# Altium PCB PanelFK_PLC.PcbDoc
Units mil, origin at the board's own origin, x right, y up, seen from the top; angles counter-clockwise.
Board outline 6000 x 4000 mil, 2 copper layers (Top Layer, Bottom Layer); 25 components, 21 nets, 95 pads, 0 vias.
Unrouted connection lines stored in the file: 5.
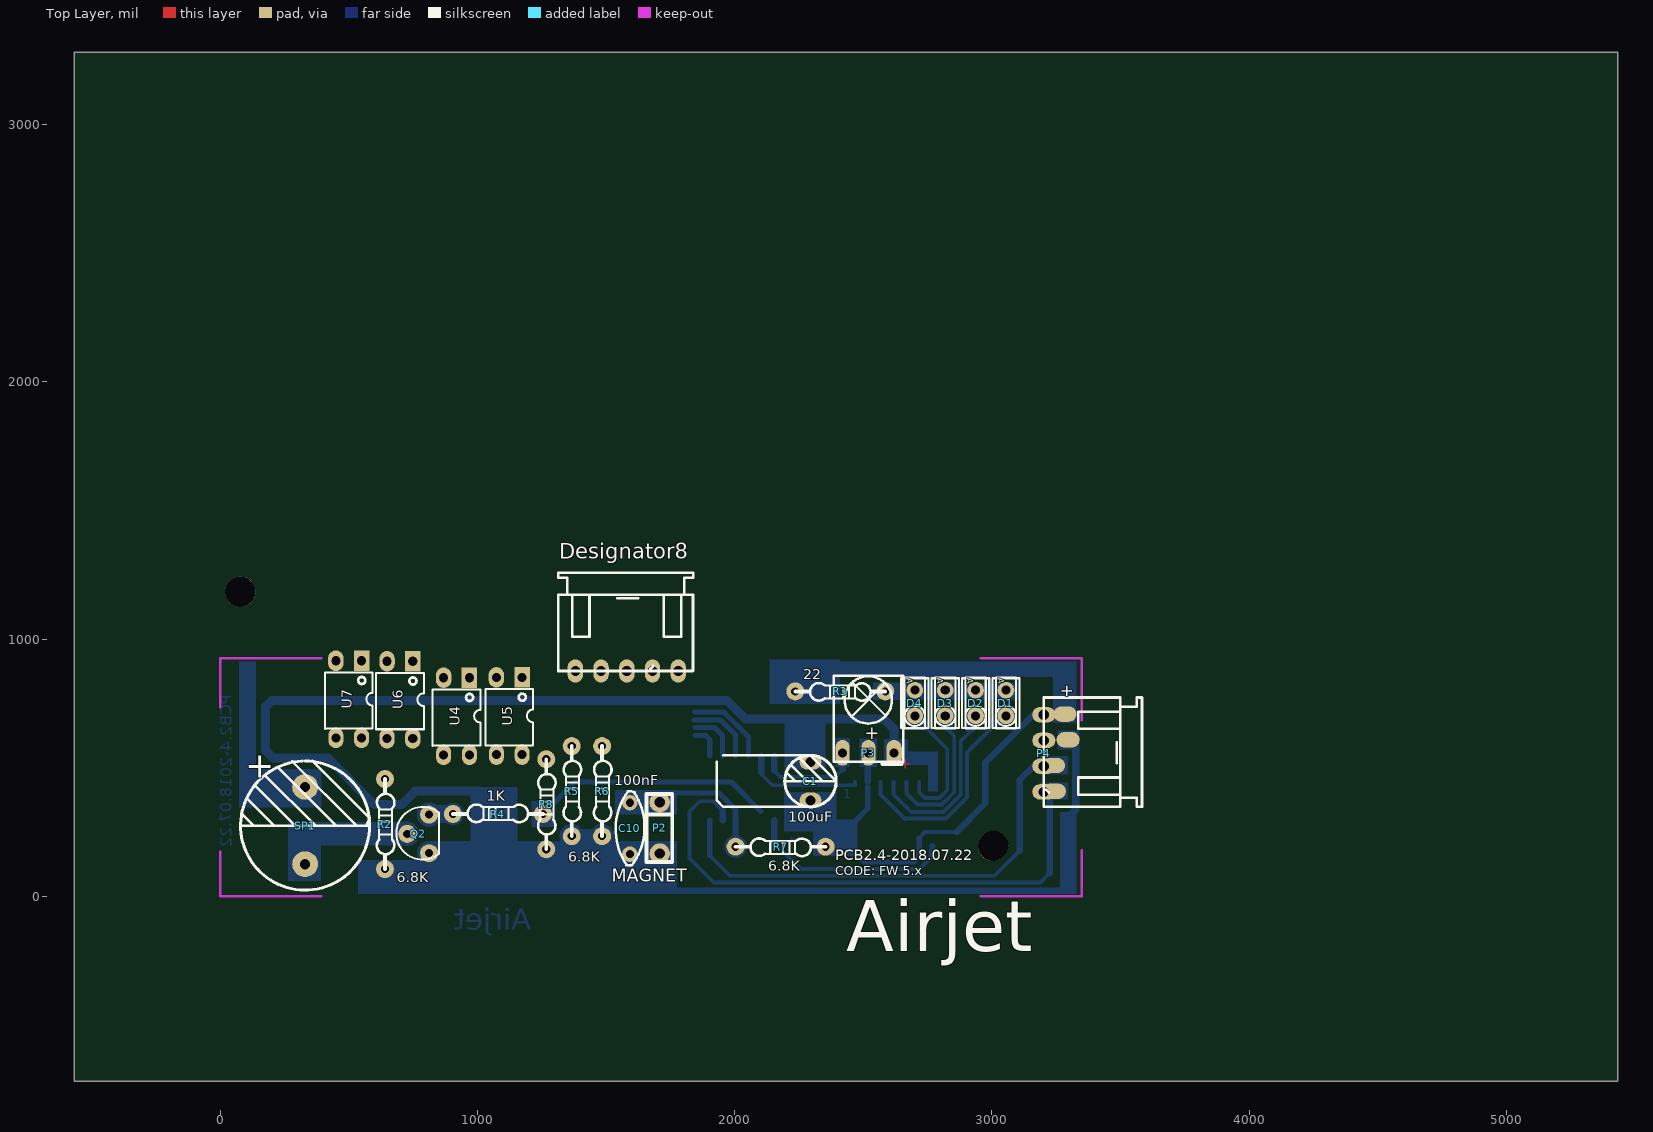
[diagram p0: Top Layer view]
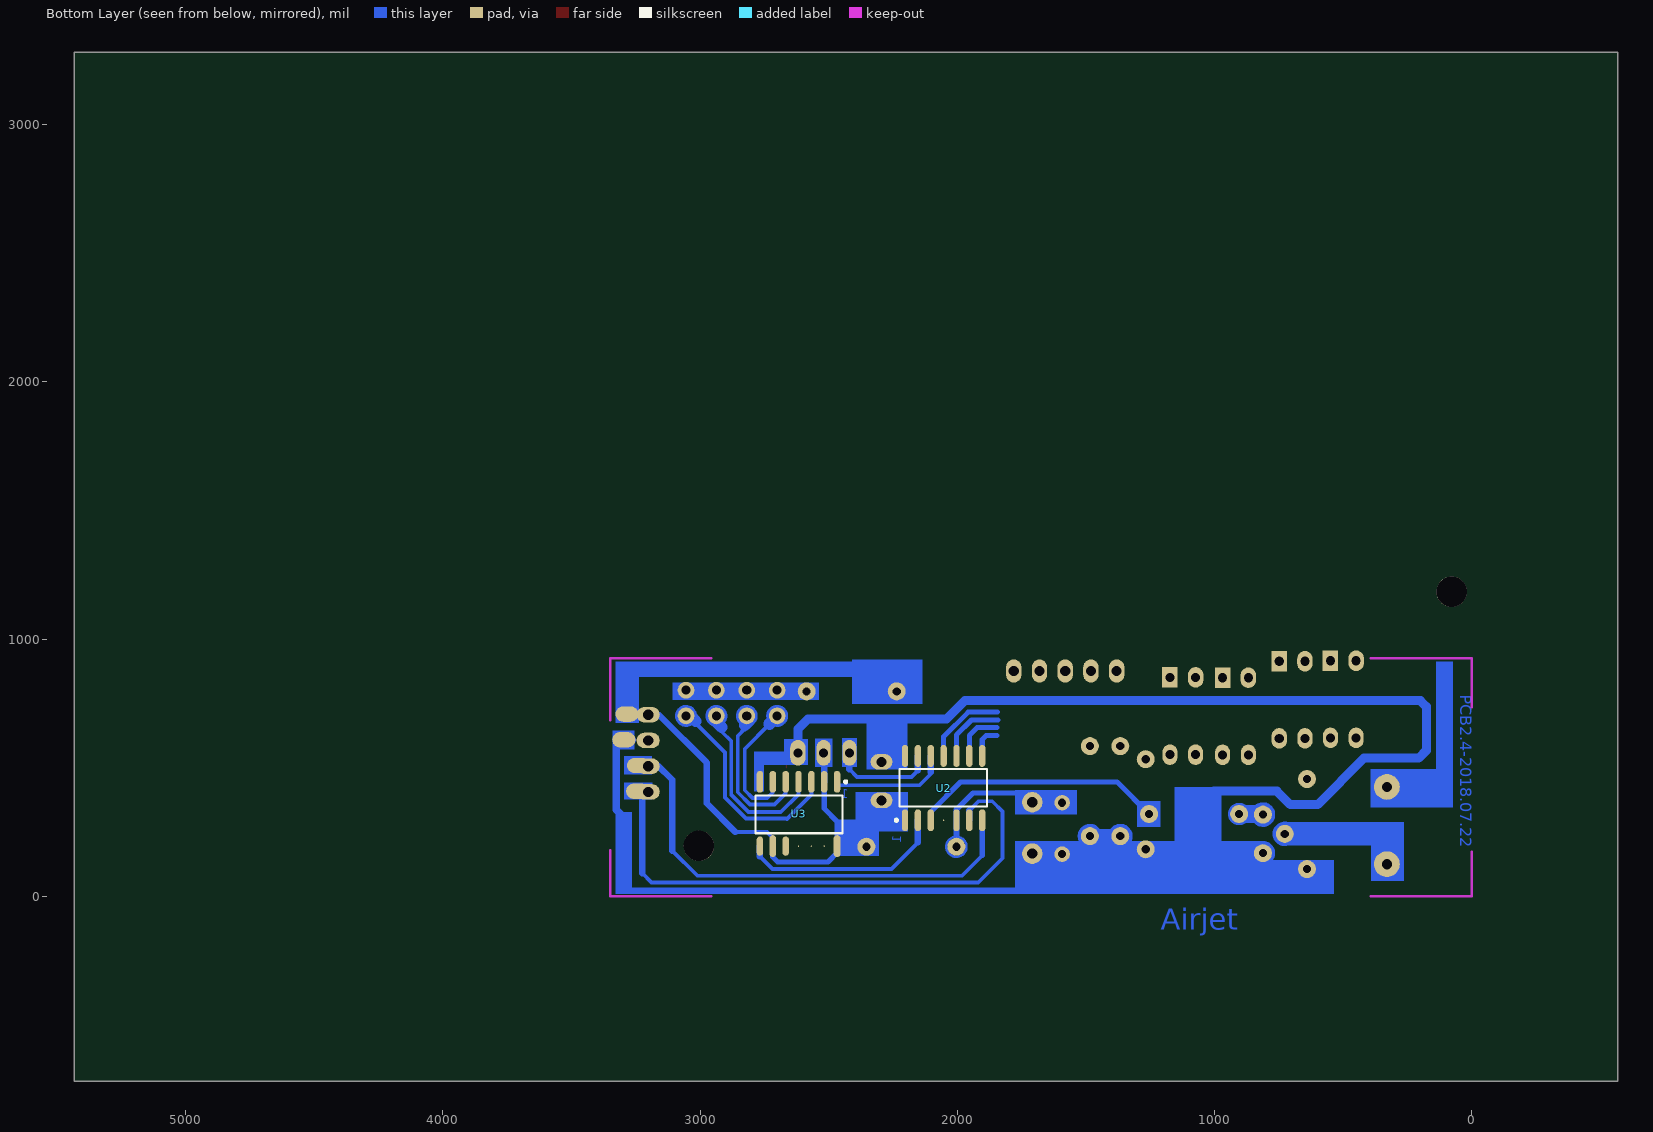
[diagram p1: Bottom Layer view, seen from below]

## Layer stack, top to bottom
Top Solder: solder mask 0.4, Solder Resist, Dk 3.5
Top Layer: signal copper 1.4
Dielectric1: dielectric 12.6, FR-4, Dk 4.8
Bottom Layer: signal copper 1.4
Bottom Solder: solder mask 0.4, Solder Resist, Dk 3.5

## Board outline
-566.82,-718.74 5433.18,-718.74 5433.18,3281.26 -566.82,3281.26

## Design rules (kind name [scope] priority, off if disabled: settings)
Clearance [All] p1: gap=10
FabricationTestPointUsage TestPointUsage [All] p1: valid=0 allowmultiple=FALSE
FabricationTestpoint Testpoint [All] p1: side=3 testpointundercomponent=TRUE minsize=40 maxsize=100 preferedsize=60 minholesize=0 maxholesize=40 preferedholesize=32 testpointgrid=1 allowsidetop=TRUE allowsidebottom=TRUE usegrid=TRUE gridtolerance=0.01
PolygonConnect [All] p1: connectstyle=Relief reliefconductorwidth=10 reliefentries=4 polygonreliefangle="90 Angle" airgapwidth=10
RoutingVias [All] p1: holewidth=28 width=50 viastyle="Through Hole" minholewidth=28 minwidth=50 maxholewidth=28 maxwidth=50
SolderMaskExpansion [All] p1: expansion=4
Width [All] p1: maxlimit=100 minlimit=10 preferedwidth=25 minimp=50.000000 maximp=50.000000 favimp=50.000000
27 further rules are at their usual default settings.

## Classes and differential pairs
component class DDFK: C1 C10 D1 D2 D3 D4 P2 P3 P4 P5 Q2 R2 R4 R5 R6 R7 SP1 U2 U3

## Components (designator, comment, footprint, x,y, rotation, side; value= is the part's Value field where it differs from the comment)
C1 "100uF" RB.15/.2 2295,398 r90 top
C10 "100nF" RAD0.2 1593,164 r90 top
D1 "L1" LED0.5Rec 3055.12,751.54 r270 top locked
D2 "L2" LED0.5Rec 2937.01,751.54 r270 top locked
D3 "L3" LED0.5Rec 2818.9,751.54 r270 top locked
D4 "L4" LED0.5Rec 2700.79,751.54 r270 top locked
Designator8 "Comment" xH5RA 1381,876 r270 top
P2 "Magnet" Magnet 1709,366 r270 top
P3 "IrReceiver" IrRec1 2519.68,763.8 r0 top locked
P4 "Header 4" xH4RA 3202,706 r180 top
Q2 "2N3904" TO92BS2 787.4,242.8 r270 top
R2 "6.8K" RES0.35 641,106 r90 top
R3 "22" RES0.35 2236,797 r0 top (schematic designator R1)
R4 "1K" RES0.35 1255,320 r180 top
R5 "6.8K" RES0.35 1367,234 r90 top
R6 "10K" RES0.35 1485,234 r90 top
R7 "6.8K" RES0.35 2004,193 r0 top
R8 "10K" RES0.35 1268,183 r90 top (schematic designator R6)
SP1 "BUZZER" RB.3/.6 330.39,425.2 r90 top
U2 "ATtiny24A-SSU" SOIC14#1 2203.72,295.8 r90 bottom
U3 "MC74HC164AN" SOIC14#2 2467.8,445.28 r270 bottom
U4 "PC817" DIP4-OPTO 969,850 r180 top (schematic designator U3)
U5 "PC817" DIP4-OPTO 1174,851 r180 top (schematic designator U3)
U6 "PC817" DIP4-OPTO 749,914 r180 top (schematic designator U3)
U7 "PC817" DIP4-OPTO 550,916 r180 top (schematic designator U3)

## Footprints (in the part's own frame and the unit in brackets; to place one, negate y for a bottom-side part, rotate by r counter-clockwise, add the part's x,y. Pads: shape width x height; smd on the part's side, far side on the other; paste and mask are expansions set on the pad)
DIP4-OPTO [mil] "DIP; 4 Leads; Row Spacing 7.62 mm; Pitch 2.54 mm"
  rect 60x80 hole 35.43: 1(0,0)
  oval 60x80 hole 35.43: 2(100,0)
  oval 59.05x80 hole 35.43: 3(100,300) 4(0,300)
  silkscreen extent -43,46 143,265
IrRec1 [mil] "38KHz Ir Receiver"
  oval 55x100 hole 35.43: 1(-99.65,-205.95) 2(0.35,-205.95)
  oval 60x100 hole 35.43: 3(100.35,-205.95)
  silkscreen extent -135,-249 135,94
LED0.5Rec [mil] "Led 0.5mm Rectangular"
  round 65 hole 35.43: 1(-50,0) 2(50,0)
  silkscreen extent -98,-53 98,53
Magnet [mil]
  round 80 hole 39.37: 1(0,0) 2(200,0)
  silkscreen extent -31,-51 232,49
RAD0.2 [mil]
  round 60 hole 31.5: 1(0,0) 2(200,0)
  silkscreen extent -44,-57 244,55
RB.3/.6 [mil]
  round 100 hole 40: 1(0,0) 2(-300,0)
  silkscreen extent -401,-251 102,251
RB.15/.2 [mil]
  oval 60x85 hole 39.37: 1(-25,0) 2(125,0)
  silkscreen extent -50,-100 150,100
RES0.35 [mil] "Diode, Axial; Body 5.2 x 2.7 mm (LxDia. max), Lead Dia. 0.86 mm (max)"
  round 70 hole 31.5: 1(0,0)
  round 70 hole 31.5 paste+0: 2(350,0)
  silkscreen extent 0,-37 350,32
SOIC14#1 [mil] "SOIC, 16-Leads, Body 9.9x3.9mm, Pitch 1.27mm, IPC High Density"
  oval 85x25 smd: 1(0,0) 2(0,-50) 3(0,-100) 5(0,-200) 6(0,-250) 7(0,-300) 8(250.04,-300) 9(250.04,-250) 10(250.04,-200) 11(250.04,-150) 12(250.04,-100) 13(250.04,-50) 14(250.04,0)
  round 5 smd: 4(0,-150)
  silkscreen extent -5,-318 200,38, body extent 16,-318 235,20, height 69
SOIC14#2 [mil] "SOIC, 16-Leads, Body 9.9x3.9mm, Pitch 1.27mm, IPC High Density"
  oval 85x25 smd: 1(0,0) 2(0,-50) 3(0,-100) 4(0,-150) 5(0,-200) 6(0,-250) 7(0,-300) 9(250.04,-250)
  oval 75x25 smd: 8(250.04,-300) 10(250.04,-200)
  round 5 smd: 11(250.04,-150) 12(250.04,-100) 13(250.04,-50)
  oval 85x27 smd: 14(250.04,0)
  silkscreen extent -5,-318 200,38, body extent 16,-318 235,20, height 69
TO92BS2 [mil] "NPN-CC5551,C945 Base Side"
  round 70 hole 31.5: 1(-75,25) 2(0,-60) 3(75,25)
  silkscreen extent -105,-102 100,63
xH4RA [mil] "100mil between pins"
  oval 90x60 hole 39.37: 1(0,0) 2(0,100) 3(0,200) 4(0,300)
  silkscreen extent -382,-67 0,358
xH5RA [mil] "100mil between pins"
  oval 90x60 hole 39.37: 1(0,0) 2(0,100) 3(0,200) 4(0,300) 5(0,400)
  silkscreen extent -382,-67 0,458

## Part data
C1 C10: library part Cap, "Capacitor SMD"
D1 D2 D3 D4: library part LED0.5, "LED Radial 0.5"
P2: library part "Header 6", "Header, 6-Pin"
P3: library part "Header 3", "3pin"
P4: library part "Header 5", "Header, 5-Pin"
Q2: library part BC337, "NPN General Purpose Amplifier"
R2 R3 R4 R5 R6 R7 R8: library part Resistor, "Resistor"
U2: library part ATtiny24-16PC, "8-Bit AVR Microcontroller with 2K Bytes of Flash Memory"
U3: "8-Bit Serial Input / Parallel-Output Shift Register"
U4 U5 U6 U7: library part Optoisolator1, "4-Pin Phototransistor Optocoupler"

## Free pads (board coordinates)
  round 118.11 hole 118.11: 0(3005,196) 1(79,1184)
  oval 90x60 all layers, no hole: 2(3240,508.66) 2(3243,408.66) 2(3285,708.66) 2(3297,608.66)

## Nets (pads, with @x,y where several pads share a name; then routed paths per layer and width w, separated by ;. In a path a pad name is that pad's centre, name@x,y a point inside that pad or via, vN(x,y) a via of type N, cw(c..) or ccw(c..) an arc to the next point about the centre after c; other vN are vias at no path point)
+5V: C1.1 P3.2 P4.1 pad.2@3285,708.66 R3.1 R7.2 SP1.1 U2.1 U3.2 U3.9 U3.14 | length 1737.7
  Bottom Layer w15: U3.9@2717.8,227.28 2740.8,250.28 2863.28,250.28
  Bottom Layer w20: R7.2 R7.2@2378,169 ; U3.2@2517.8,425.28 2517.8,341.28 2467.8,291.28 U3.14 2467.8,169.2 2503,134 2698.52,134 2717.8,153.28 U3.9 ; U3.2@2520.04,448.96 P3.2 ; U3.9@2717.8,211.28 U3.9 ; U3.9@2717.8,227.28 U3.9
  Bottom Layer w25: U3.2 P3.2@2517.8,557.85 ; 2863.28,250.28 2975,362 2975,520 3159.5,704.5 pad.2@3270.5,704.5
BUZZER: R4.1 U2.3 | length 945.6
  Bottom Layer w20: R4.1 1379,444 1988,444 U2.3@2102,330
CLK: U2.2 U3.8 | length 803.6
  Bottom Layer w15: 2153.72,209.28 2256.5,106.5 2719.5,106.5 2767.8,154.8
  Bottom Layer w25: 2153.72,209.28 U2.2 ; 2767.8,154.8 U3.8
DIMOUT: P4.3 pad.2@3240,508.66 U2.7 | length 1876.5
  Bottom Layer w15: 1903.72,158.28 1982,80 3011,80 3109,178
  Bottom Layer w20: 1903.72,158.28 U2.7
  Bottom Layer w25: 3109,178 3109,453 3164,508 3257.62,508 pad.2@3267.72,497.91
GND: C1.2 C10.1 P2.2 P3.3 P4.2 pad.2@3297,608.66 Q2.3 R2.1 R5.1 R6.1 R8.1 U2.14 U3.7 | length 4896.1
  Bottom Layer w25: 847.4,167.8 ccw(c812.4,167.8) 847.4,167.8
  Bottom Layer w30: 3288,298.94 3326,336.94 pad.2@3326,589
  Bottom Layer w35: 1078,203 1078,334.28 1003.28,409 758,409 706,357 599.89,357 419.89,537 207,537 177,567 177,738 200,761 1971,761 2043,689 2581,689 2620.04,649.96 P3.3 ; pad.2@3287.23,608.66 3267.72,608.66 pad.2@3306.34,608.66 ; R5.1@1397.15,234 ccw(c1367,234) R5.1@1397.15,234 ; R6.1@1515.15,234 ccw(c1485,234) R6.1@1515.15,234
IRSEN: P3.1 U2.13 | length 409.6
  Bottom Layer w15: 2153.72,489.28 2179,464 2390,464 2420.04,494.04
  Bottom Layer w25: 2153.72,489.28 U2.13 ; 2420.04,494.04 P3.1
KEY1: R2.2 U2.10 | length 267.8
  Bottom Layer w20: 1842,686 1945.57,686 2003.72,627.85 U2.10
KEY2: R5.2 U2.8 | length 127.7
  Bottom Layer w20: 1846,625 1888,625 1903.72,609.28 U2.8
KEY3: R6.2 U2.9 | length 199.9
  Bottom Layer w20: 1846,656 1923,656 1953.72,625.28 U2.9
MAGNET: C10.2 P2.1 R7.1 U2.5 | length 803.3
  Bottom Layer w10: 2043.01,193 ccw(c2004,193) 2043.01,193
  Bottom Layer w20: 1635.5,368.5 1669,402 1939,402 U2.5@2003.72,337.28
  Bottom Layer w25: R7.1@2003.72,188 U2.5 U2.5@2003.72,337.28
NetD1_1: D1.1 D2.1 D3.1 D4.1 R3.2
NetD1_2: D1.2 U3.3 | length 1039.9
  Bottom Layer w15: U3.3 2567.8,395.28 2662.8,300.28 2664.8,302.28 2822.49,302.28 2904,383.78 2904,558.78 3016.5,671.28 3016.5,681.5
  Bottom Layer w25: D1.2@3085.12,701.54 ccw(c3055.12,701.54) D1.2@3085.12,701.54
  Bottom Layer w45: 3016.5,681.5 3036.54,701.54 D1.2
NetD2_2: D2.2 U3.4 | length 873.1
  Bottom Layer w15: U3.4 2617.8,396.28 2686.8,327.28 2812.14,327.28 2879,394.14 2879,603 2918,642
  Bottom Layer w25: D2.2@2967.01,701.54 ccw(c2937.01,701.54) D2.2@2967.01,701.54
  Bottom Layer w45: 2917,657 D2.2@2955.27,695.27
NetD3_2: D3.2 U3.5 | length 810.6
  Bottom Layer w15: U3.5 2667.8,400.2 2710.72,357.28 2806.78,357.28 2854,404.49 2854,624 2827.5,650.5 2827.5,665.5 ; D3.2@2824.9,707.54 D3.2@2835.72,696.72 ; 2825,649 2838.5,662.5
  Bottom Layer w25: D3.2@2848.9,701.54 ccw(c2818.9,701.54) D3.2@2848.9,701.54
  Bottom Layer w45: D3.2@2807.4,684.6 2827,665 ; D3.2@2818.9,682.1 D3.2
NetD4_2: D4.2 U3.6 | length 701.2
  Bottom Layer w15: U3.6 2717.8,404.28 2739.8,382.28 2796.43,382.28 2826.72,412.57 2826.72,573.28 2730.5,669.5
  Bottom Layer w25: D4.2@2730.79,701.54 ccw(c2700.79,701.54) D4.2@2730.79,701.54
  Bottom Layer w45: D4.2 2730.5,671.82 2730.5,669.5
NetD5_2: U3.10
NetQ2_1: Q2.1 R4.2 | length 385.5
  Bottom Layer w25: 847.76,317.8 ccw(c812.4,317.8) 847.76,317.8
  Bottom Layer w35: R4.2@931,320 ccw(c905,320) R4.2@931,320
NetQ2_2: Q2.2 SP1.2 | length 219.9
  Bottom Layer w25: 762.4,242.8 ccw(c727.4,242.8) 762.4,242.8
SERDATA: U2.12 U3.1 | length 529.3
  Bottom Layer w15: U2.12 2103.72,476.28 2148,432 2467.8,432 U3.1
  Bottom Layer w25: 2103.72,481.8 U2.12
VMIC: 
ZEROC: P4.4 pad.2@3243,408.66 U2.6 | length 2149
  Bottom Layer w15: U2.6@1953.72,334.28 1918.5,369.5 1864.5,369.5 1825,330 1825,148 1919,54 3189,54 3225,90
  Bottom Layer w25: U2.6 U2.6@1953.72,334.28 ; 3225,90 P4.4@3225,405
pads on no net: Designator8.1 Designator8.2 Designator8.3 Designator8.4 Designator8.5 R8.2 U2.4 U2.11 U3.11 U3.12 U3.13 U4.1 U4.2 U4.3 U4.4 U5.1 U5.2 U5.3 U5.4 U6.1 U6.2 U6.3 U6.4 U7.1 U7.2 U7.3 U7.4
copper on no net: | length 323.8
  Bottom Layer w20: 1844,716 1958,716 2053.72,620.28 2053.72,545.84

## Keep-outs
Keep-Out Layer:
  lines w10: 0,174 0,0 393.7,0 ; 0,735 0,925.2 393.7,925.2 ; 2956.69,0 3350.39,0 3350.39,180 ; 2956.69,925.2 3350.39,925.2 3350.39,685

## Other copper
Top Layer:
  text "+" at 2686,497 h39.37
Bottom Layer:
  rectangle net GND: 974,212 1156,426
  rectangle net +5V: 2135,747 2409,921
  rectangle net GND: 1401,214 1453,261
  rectangle net GND: 811,119 876,216
  rectangle net IRSEN: 2391,502 2448,615
  rectangle net GND: 2675,510 2752.8,562.28
  rectangle net GND: 3266,35 3330,328
  rectangle net ZEROC: 3186,377 3297,443
  rectangle net DIMOUT: 3187,474 3296,545
  rectangle net GND: 3255,570 3341,644
  rectangle net MAGNET: 1535,318 1777,414
  rectangle net +5V: 2304,156 2476,298
  rectangle net GND: 536,10 876,142
  rectangle net +5V: 2486,502 2553,613
  rectangle net NetD1_1: 2539,764 3107,832
  rectangle net +5V: 3237,673 3330,853
  rectangle net +5V: 2408,853 3330,913
  rectangle net NetQ2_2: 263,60 393,197
  rectangle net +5V: 140,345 394,495
  rectangle net +5V: 73,345 140,913
  rectangle net BUZZER: 1211,269 1301,371
  region net GND: 2752.8,562.28 2752.8,407.28 2790,407.28 2790,562.28
  rectangle net GND: 2195,493 2353,707
  rectangle net +5V: 2193,253 2397,405
  rectangle net GND: 847,24 1777,216
  rectangle net GND: 621,10 3330,35
  rectangle net NetQ2_2: 263,197 727,289
  rectangle net NetQ2_1: 798.4,285 905,355
  rectangle net GND: 2581,510 2675,612
  text "PCB2.4-2018.07.22" at 61,783 h78.74 r90
  text "1" at 2423,370 h60
  text "1" at 2207,238 h60 r270
  text "Airjet" at 1209,-157 h140

## Silkscreen, mask and mechanical layers (free items; w line width, h text height)
Top Overlay:
  circle w10: c2519.68,763.8 r92.01
  lines w8: 2459,831 2584,706 ; 2461,705 2586,830
  lines w10: 1931,523 1931,373 1956,348 2298,348 ; 1955.91,547.91 2290.66,547.91
  text "+" at 3256,824 h80 r270
  text "+" at 2507,611 h50
  text "+" at 98,461 h100
  text "PCB2.4-2018.07.22" at 2391,127 h70
  text "CODE: FW 5.x" at 2391,70 h60
  text "MAGNET" at 1523,57 h50
  text "Airjet" at 2434,-279 h340

## Text inside footprints (layer, text, board x,y; h text height)
D1: Top Overlay "A" at 3018,848 h39.37 r270
D2: Top Overlay "A" at 2897.64,848.78 h39.37 r270
D3: Top Overlay "A" at 2779.53,848.78 h39.37 r270
D4: Top Overlay "A" at 2661.42,848.78 h39.37 r270